# Altium PCB ZBoard_2022-08-04.pcbdoc (part 1 of 2)
Units mil, origin at the board's own origin, x right, y up, seen from the top; angles counter-clockwise.
Board outline 6819.96 x 4772.13 mil, 2 copper layers (Top Layer, Bottom Layer); 74 components, 107 nets, 320 pads, 194 vias.
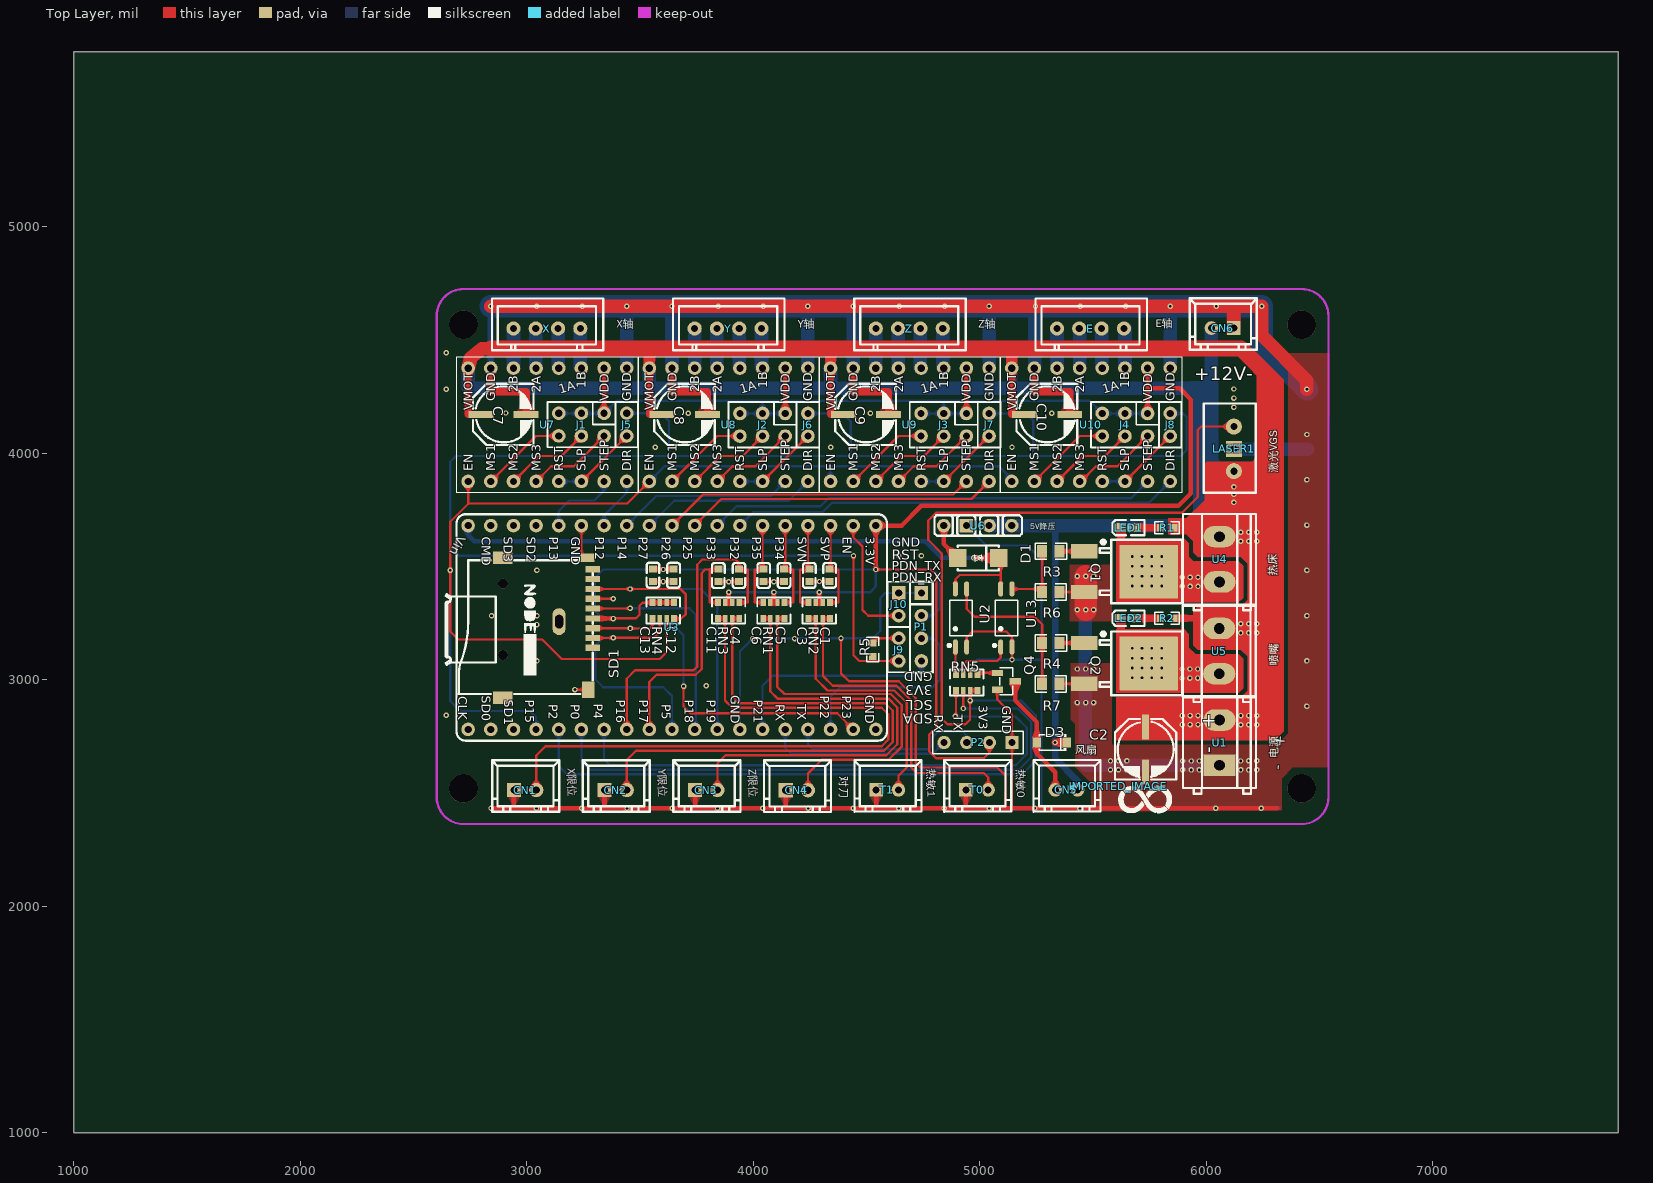
[diagram p0: Top Layer view]
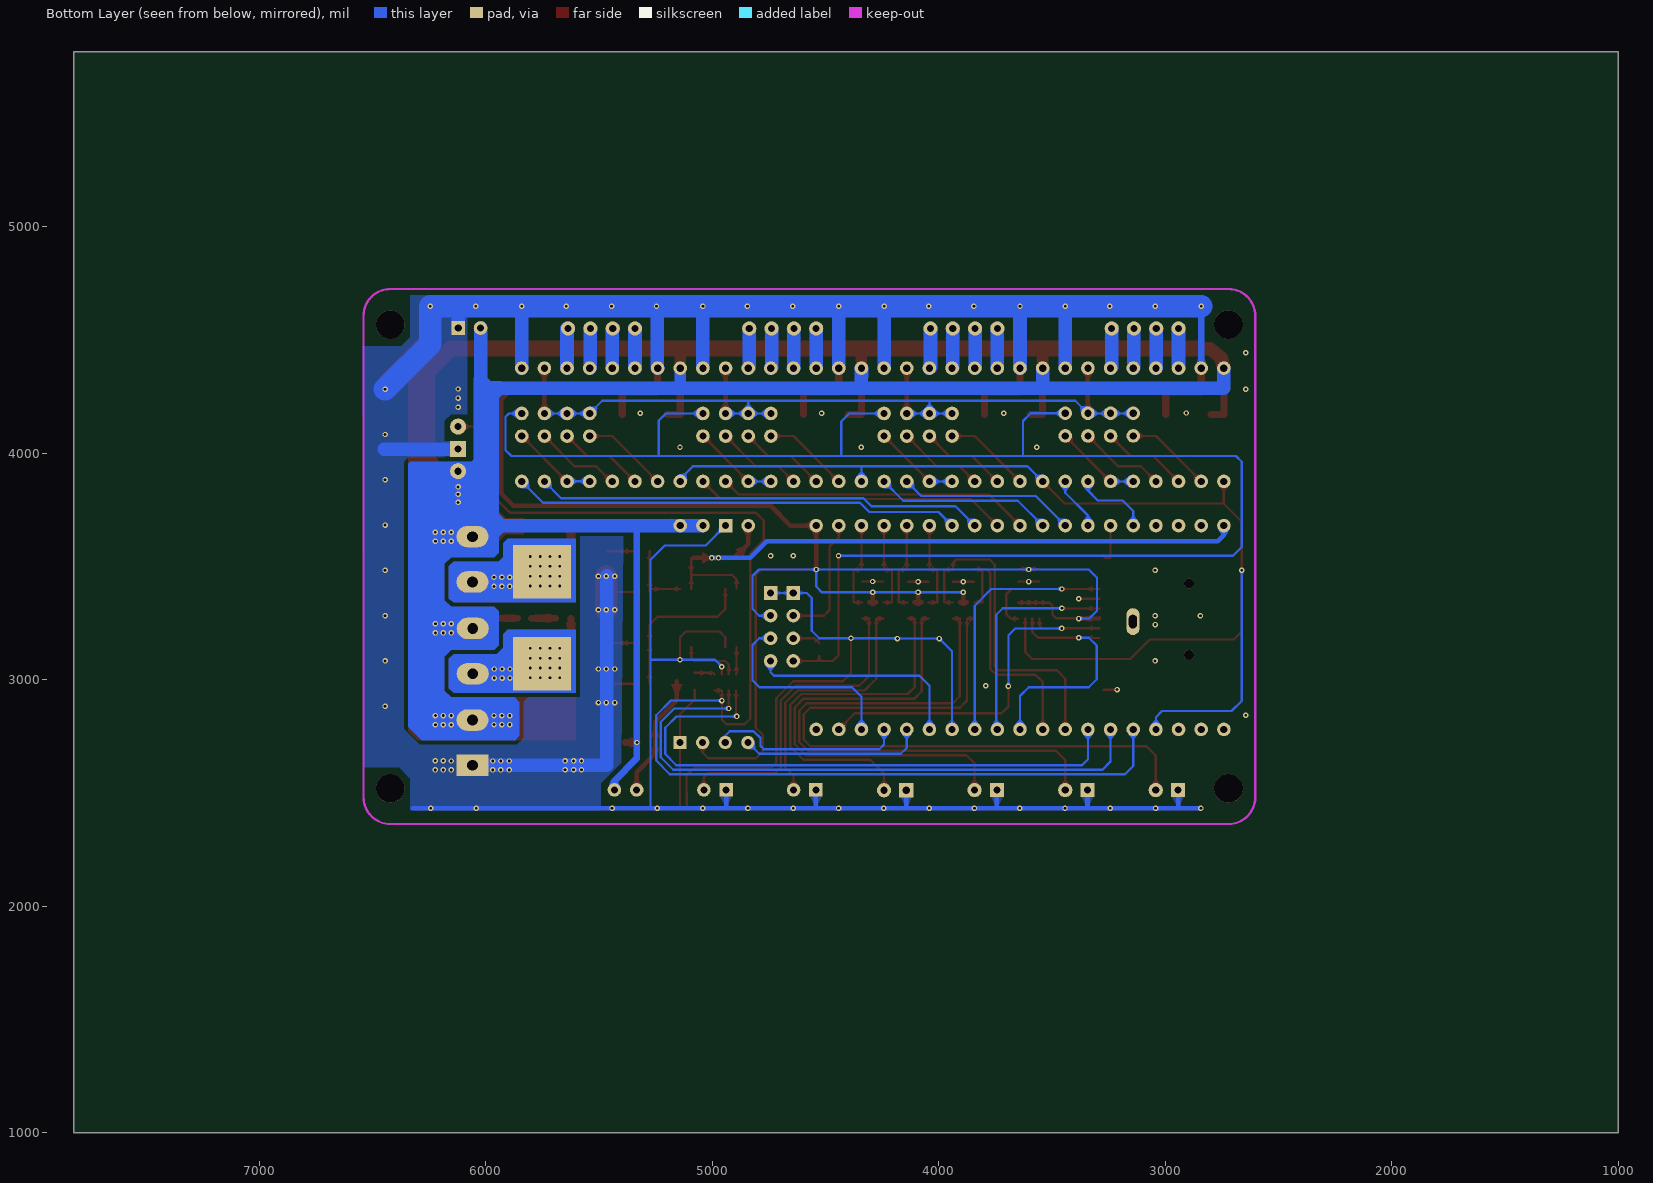
[diagram p1: Bottom Layer view, seen from below]

## Layer stack, top to bottom
Top Layer: signal copper (thickness not stored)
Dielectric: dielectric 12.6, FR-4, Dk 4.8
Bottom Layer: signal copper (thickness not stored)

## Board outline
7819.96,1000 1000,1000 1000,5772.13 7819.96,5772.13

## Components (designator, comment, footprint, x,y, rotation, side; value= is the part's Value field where it differs from the comment)
C1 "100nF" C0603 4338,3460.13 r90 top
C2 "100uF" CAP-D6.3XH7.7 5732.96,2690.74 r90 top
C3 "100nF" C0603 4248,3460.13 r90 top
C4 "100nF" C0603 3937.4,3459.83 r90 top
C5 "100nF" C0603 4136.7,3459.83 r90 top
C6 "100nF" C0603 4046.7,3459.83 r90 top
C7 "100uF" CAP-D6.3XH7.7 2897.96,4170.74 r180 top
C8 "100uF" CAP-D6.3XH7.7 3697.96,4170.74 r180 top
C9 "100uF" CAP-D6.3XH7.7 4497.96,4170.74 r180 top
C10 "100uF" CAP-D6.3XH7.7 5297.96,4170.74 r180 top
C11 "100nF" C0603 3846.3,3459.83 r90 top
C12 "100nF" C0603 3648.6,3459.83 r270 top
C13 "100nF" C0603 3557.5,3460.43 r270 top
CN1 "X限位" CONN-TH_XH-2A#1 2992.96,2512 r0 top
CN2 "Y限位" CONN-TH_XH-2A#1 3392.96,2512 r0 top
CN3 "Z限位" CONN-TH_XH-2A#1 3792.96,2512 r0 top
CN4 "对刀" CONN-TH_XH-2A#1 4192.96,2511.3 r0 top
CN5 "FAN" CONN-TH_XH-2A#2 5383.45,2512.93 r0 top
CN6 "FAN0" CONN-TH_XH-2A#3 6072.96,4552 r0 top
D1 "SS24_C84028" DO-214AC_L4.3-W2.7-LS5.3-RD 4993.95,3537 r180 top
D3 "SS14D1F" SOD-123_L2.8-W1.8-LS3.7-RD 5317.96,2722 r180 top
E "E轴" CONN-TH_4P-P2.50_XH-4A 5489.35,4549.83 r0 top
IMPORTED_IMAGE "IMPORTED_IMAGE" IMPORTED_IMAGE 5612.72,2528.33 r0 top
J1 "Header-Male-2.54_2x3" HDR-TH_6P-P2.54-V-R2-C3-S2.54 3241.7,4125.73 r180 top
J2 "Header-Male-2.54_2x3" HDR-TH_6P-P2.54-V-R2-C3-S2.54 4041.7,4124.83 r180 top
J3 "Header-Male-2.54_2x3" HDR-TH_6P-P2.54-V-R2-C3-S2.54 4841.7,4124.83 r180 top
J4 "Header-Male-2.54_2x3" HDR-TH_6P-P2.54-V-R2-C3-S2.54 5641.7,4124.83 r180 top
J5 "X_UART" HDR-2X1/2.54#1 3441.7,4125.74 r180 top
J6 "Y_UART" HDR-2X1/2.54#1 4241.7,4124.83 r180 top
J7 "Z_UART" HDR-2X1/2.54#1 5041.7,4124.83 r180 top
J8 "E_UART" HDR-2X1/2.54#1 5841.7,4124.83 r180 top
J9 "PDN_UART" HDR-2X1/2.54#1 4643,3132 r0 top
J10 "RESET" HDR-2X1/2.54#2 4642.96,3332 r0 top
LASER1 "激光VGS" CONN-TH_XH-3A 6122.96,4018.38 r90 top
LED1 "LED-Blue(0603)" LED-0603-R 5657.96,3670.74 r0 top
LED2 "LED-Blue(0603)" LED-0603-R 5657.96,3270.74 r0 top
P1 "I2C" 排母2.54_1X4 4742.96,3232 r270 top
P2 "UART" HDR1X4 5192.96,2672 r90 top
Q1 "YJD20N06A" TO-252-2_L6.6-W6.1-P4.57-LS9.9-BR-CW 5604.21,3476.95 r180 top
Q2 "YJD20N06A" TO-252-2_L6.6-W6.1-P4.57-LS9.9-BR-CW 5604.21,3071.04 r180 top
Q4 "AS2304" SOT-23-3_L2.9-W1.3-P1.90-LS2.4-BR 5117.96,2992 r180 top
R1 "2.7K" R0603 5827.9,3670.73 r0 top
R2 "2.7K" R0603 5827.9,3270.73 r0 top
R3 "1K" R0805 5314.3,3566.63 r180 top
R4 "1K" R0805 5314.3,3161.63 r180 top
R5 "1K" R0603 4527.96,3132 r270 top
R6 "100K" R0805 5314.2,3386.03 r180 top
R7 "100K" R0805 5314.2,2981.03 r180 top
RN1 "4.7K" RES-ARRAY-SMD_0603-8P-L3.2-W1.6-BL 4091.7,3304.84 r180 top
RN2 "4.7K" RES-ARRAY-SMD_0603-8P-L3.2-W1.6-BL 4291.7,3304.84 r180 top
RN3 "4.7K" RES-ARRAY-SMD_0603-8P-L3.2-W1.6-BL 3891.7,3304.84 r180 top
RN4 "4.7K" RES-ARRAY-SMD_0603-8P-L3.2-W1.6-BL 3603,3304.04 r0 top
RN5 "470" RES-ARRAY-SMD_0603-8P-L3.2-W1.6-BL 4943,2987.04 r180 top
SD1 "TF-Card" TF卡带孔 3051.7,3189.83 r180 top
T0 "热敏0" CONN-TH_XH-2A#4 4988.46,2512.9 r0 top
T1 "热敏1" CONN-TH_XH-2A#4 4592.26,2512.9 r0 top
U1 "电源" CONN-TH_P5.08_KF127-5.08-2P#1 6059.22,2721.02 r90 top
U2 "EL3H7(B)(TA)-G" SOP-4_L4.4-W2.8-P1.27-LS7.0-TL 4917.96,3272 r90 top
U3 "NodeMCU-32SLua" AI-THINKER_NODEMCU-32SLUA 3641.7,3229.83 r270 top
U4 "热床" CONN-TH_P5.08_KF127-5.08-2P#2 6059.22,3531.02 r90 top
U5 "喷嘴" CONN-TH_P5.08_KF127-5.08-2P#2 6057.96,3125.74 r90 top
U6 "5V降压" DC_MOUDLE 5141.7,3679.83 r270 top
U7 "4988" ?#1 3091.7,4124.83 r90 top
U8 "4988" ?#1 3891.7,4124.83 r90 top
U9 "4988" ?#1 4691.7,4124.83 r90 top
U10 "4988" ?#1 5491.7,4124.83 r90 top
U13 "EL3H7(B)(TA)-G" SOP-4_L4.4-W2.8-P1.27-LS7.0-TL 5117.96,3272 r90 top
X "X轴" CONN-TH_4P-P2.50_XH-4A 3089.35,4549.83 r0 top
Y "Y轴" CONN-TH_4P-P2.50_XH-4A 3889.35,4549.83 r0 top
Z "Z轴" CONN-TH_4P-P2.50_XH-4A 4689.35,4549.83 r0 top
? "" ?#2 2132.48,3544.64 r0 top
? "" ?#2 6867.96,3548.38 r0 top
? "" ?#2 4576.46,4945.44 r0 top
? "" ?#2 4573.35,2019.2 r0 top

## Footprints (in the part's own frame and the unit in brackets; to place one, negate y for a bottom-side part, rotate by r counter-clockwise, add the part's x,y. Pads: shape width x height; smd on the part's side, far side on the other; paste and mask are expansions set on the pad)
AI-THINKER_NODEMCU-32SLUA [mil]
  round 60 hole 32: 1(-450,-900) 2(-450,-800) 3(-450,-700) 4(-450,-600) 5(-450,-500) 6(-450,-400) 7(-450,-300) 8(-450,-200) 9(-450,-100) 10(-450,0) 11(-450,100) 12(-450,200) 13(-450,300) 14(-450,400) 15(-450,500) 16(-450,600) 17(-450,700) 18(-450,800) 19(-450,900) 20(450,-900) 21(450,-800) 22(450,-700) 23(450,-600) 24(450,-500) 25(450,-400) 26(450,-300) 27(450,-200) 28(450,-100) 29(450,0) 30(450,100) 31(450,200) 32(450,300) 33(450,400) 34(450,500) 35(450,600) 36(450,700) 37(450,800) 38(450,900)
  silkscreen extent -500,-999 500,949
C0603 [mm]
  rect 0.8x0.9 smd: 1(-0.7,0) 2(0.7,0)
  silkscreen extent -1.41,-0.71 1.39,0.72
CAP-D6.3XH7.7 [mm]
  rect 2.8x0.8 smd: 1(2.54,0) 2(-2.54,0)
  silkscreen extent -3.37,-3.43 3.43,3.43
CONN-TH_4P-P2.50_XH-4A [mm]
  round 1.6 hole 0.8: 1(-3.75,0) 2(-1.25,0) 3(1.25,0) 4(3.75,0)
  silkscreen extent -6.17,-2.44 6.33,3.38
CONN-TH_P5.08_KF127-5.08-2P#1 [mm]
  rect 2.4x3.6 hole 1.2: 1(-2.54,0)
  oval 2.4x3.6 hole 1.2: 2(2.54,0)
  silkscreen extent -5.71,-4.1 5.08,4.1
CONN-TH_P5.08_KF127-5.08-2P#2 [mm]
  oval 2.4x3.6 hole 1.2: 1(-2.54,0) 2(2.54,0)
  silkscreen extent -5.71,-4.1 5.08,4.1
CONN-TH_XH-2A#1 [mm]
  rect 1.6x1.6 hole 0.8: 1(-1.251,0)
  round 1.6 hole 0.8: 2(1.251,0)
  silkscreen extent -3.69,-2.45 3.83,3.35
CONN-TH_XH-2A#2 [mm]
  round 1.524 hole 0.8: 1(-1.251,0) 2(1.251,0)
  silkscreen extent -3.69,-2.45 3.83,3.35
CONN-TH_XH-2A#3 [mm]
  round 1.524 hole 0.8: 1(-1.251,0)
  rect 1.524x1.524 hole 0.8: 2(1.251,0)
  silkscreen extent -3.69,-2.45 3.83,3.35
CONN-TH_XH-2A#4 [mm]
  rect 1.524x1.524 hole 0.8: 1(-1.251,0)
  round 1.524 hole 0.8: 2(1.251,0)
  silkscreen extent -3.69,-2.45 3.83,3.35
CONN-TH_XH-3A [mm]
  round 1.8 hole 0.8: 1(-2.501,0) 3(2.501,0)
  rect 1.8x1.8 hole 0.8: 2(0.001,0)
  silkscreen extent -4.92,-2.44 5.09,3.38
DC_MOUDLE [mil]
  round 60 hole 31.5: 1(0,0) 2(0,-100) 4(0,-300)
  rect 60x60 hole 31.5: 3(0,-200)
  silkscreen extent -46,-340 46,45
DO-214AC_L4.3-W2.7-LS5.3-RD [mm]
  rect 2x2 smd: 1(-2.3,0) 2(2.3,0)
  silkscreen extent -2.3,-1.4 2.3,1.4
HDR1X4 [mm]
  rect 1.5x1.5 hole 0.8: 1(1.271,1.269)
  round 1.5 hole 0.8: 2(1.271,3.808) 3(1.271,6.348) 4(1.271,8.888)
  silkscreen extent 0,0 2.54,10.16
HDR-2X1/2.54#1 [mil]
  round 60 hole 31.5: 1(0,50) 2(0,-50)
  silkscreen extent -50,-100 50,100
HDR-2X1/2.54#2 [mil]
  rect 60x60 hole 31.5: 1(0,50)
  round 60 hole 31.5: 2(0,-50)
  silkscreen extent -50,-100 50,100
HDR-TH_6P-P2.54-V-R2-C3-S2.54 [mil]
  round 60 hole 31.5: 1(-100,-50) 2(-100,50) 3(0,-50) 4(0,50) 5(100,-50) 6(100,50)
  silkscreen extent -150,-100 150,100
IMPORTED_IMAGE [mil]
  silkscreen extent 0,-118 236,0
LED-0603-R [mil]
  rect 43x39 smd: 1(33.5,0) 2(-33.5,0)
  silkscreen extent -72,-34 70,34
R0603 [mil]
  rect 31.75x34.02 smd: 1(-29.65,0) 2(29.65,0)
  silkscreen extent -55,-26 55,26
R0805 [mil]
  rect 44.59x54.21 smd: 1(-38.04,0) 2(38.04,0)
  silkscreen extent -69,-36 69,36
RES-ARRAY-SMD_0603-8P-L3.2-W1.6-BL [mm]
  rect 0.65x0.8 smd: 1(-1.2,-0.9) 4(1.2,-0.9) 5(1.2,0.9) 8(-1.2,0.9)
  rect 0.5x0.8 smd: 2(-0.4,-0.9) 3(0.4,-0.9) 6(0.4,0.9) 7(-0.4,0.9)
  silkscreen extent -1.87,-1.45 1.87,1.47
SOD-123_L2.8-W1.8-LS3.7-RD [mm]
  rect 0.95x1.15 smd: 1(-1.693,0) 2(1.693,0)
  silkscreen extent -1.63,-0.94 1.41,0.94
SOP-4_L4.4-W2.8-P1.27-LS7.0-TL [mm]
  oval 1.71x0.56 smd: 1(-3.255,0.635) 2(-3.255,-0.635) 3(3.255,-0.635) 4(3.255,0.635)
  silkscreen extent -3.24,-1.25 1.97,1.47
SOT-23-3_L2.9-W1.3-P1.90-LS2.4-BR [mm]
  rect 1.25x0.7 smd: 1(1,-0.95) 2(1,0.95) 3(-1,0)
  silkscreen extent -0.73,-1.53 0.73,1.53
TF卡带孔 [mil]
  rect 63x27.6 smd: 1(-240,50) 2(-240,6) 3(-240,-37) 4(-240,-80) 5(-240,-124) 6(-240,-167) 7(-240,-210) 8(-240,-254) 9(-240,-297)
  rect 63x39.37 smd: 10(-216,-348.05)
  rect 86.6x55.1 smd: 11(158,-348.05) 12(158,269.95)
  rect 55.1x70.9 smd: 13(-219.95,234.95)
  round 43.31 hole 43.31 unplated: ""(155.85,81.08) ""(155.85,-233.88)
  silkscreen extent -240,-337 351,254
TO-252-2_L6.6-W6.1-P4.57-LS9.9-BR-CW [mm]
  rect 3x1.6 smd: 1(3.617,-2.285) 3(3.611,2.285)
  rect 6.5x6 smd: 2(-3.617,0)
  silkscreen extent -7.37,-3.57 1.88,3.57
排母2.54_1X4 [mil]
  rect 60x60 hole 31.5: 1(-150,0)
  round 60 hole 31.5: 2(-50,0) 3(50,0) 4(150,0)
  silkscreen extent -200,-50 200,50
?#1 [mil]
  round 60 hole 32: 1(-250,350) 2(-250,250) 3(-250,150) 4(-250,50) 5(-250,-50) 6(-250,-150) 7(-250,-250) 8(-250,-350) 9(250,-350) 10(250,-250) 11(250,-150) 12(250,-50) 13(250,50) 14(250,150) 15(250,250) 16(250,350)
  silkscreen extent -300,-400 300,400
?#2 [mil]

## Free pads (board coordinates)
  rect 255.91x236.22 smd: 2(5747.96,3070.74) 2(5747.96,3475.74)
  rect 255.91x236.22 smd far side: 2(5752.96,3070.74) 2(5752.96,3475.74)
  oval 59.05x118.11 hole 35.4 slot 59.05 at 90 deg: 3(3142.96,3255.74)
  round 125.98 hole 125.98 unplated: ""(2721.07,2519.48) ""(2721.07,4566.72) ""(6421.86,2519.48) ""(6421.86,4566.72)

## Via types
v1: diameter 24, hole 12, Top Layer to Bottom Layer, tented both sides, 152 vias
v2: diameter 24.02, hole 12.01, Top Layer to Bottom Layer, tented both sides, 42 vias

## Nets (pads, with @x,y where several pads share a name; then routed paths per layer and width w, separated by ;. In a path a pad name is that pad's centre, name@x,y a point inside that pad or via, vN(x,y) a via of type N, cw(c..) or ccw(c..) an arc to the next point about the centre after c; other vN are vias at no path point)
3V3: C12.1 C13.1 J1.1 J1.3 J1.5 J2.1 J2.3 J2.5 J3.1 J3.3 J3.5 J4.1 J4.3 J4.5 P1.2 P2.2 RN1.2 RN1.3 RN2.2 RN2.3 RN3.2 RN3.3 RN4.5 RN4.6 RN4.7 RN4.8 SD1.4 U3.19 U7.10 U8.10 U9.10 U10.10 | length 11346.5
  Top Layer w10: v1@3381.7,3269.33 3383.1,3270.73 3483,3270.73 3498,3285.73 3498,3325.73 3511.7,3339.43 RN4.5@3650.2,3339.43 ; C13.1@3557.5,3487.99 C12.1@3648.6,3487.39 ; v1(4541.7,3485.74) 4784.6,3485.73 4808,3462.33 4808,2787.03 4778,2757.03 4778,2682.03 4807.9,2652.03 5018,2652.03 5043,2676.93 P2.2@5043.03,2722.02
  Top Layer w20: SD1.4@3291.7,3269.83 v1@3381.7,3269.33 ; J1.1@3341.7,4174.83 U7.10@3341.7,4374.83 ; RN3.3@3875.9,3340.23 RN3.2@3907.4,3340.23 ; 3891.7,3340.23 v1(3891.7,3384.83) ; RN1.3@4075.9,3340.23 RN1.2@4107.5,3340.23 ; v1(4091.7,3384.83) 4091.7,3340.53 4091.96,3340.26 ; J2.1@4141.7,4174.83 U8.10@4141.7,4374.83 ; RN2.3@4275.9,3340.23 RN2.2@4307.5,3340.23 ; v1(4291.7,3384.83) 4291.7,3340.61 4292.05,3340.26 ; v1(4541.7,3485.74) U3.19@4541.7,3679.83 4655.8,3679.83 4743,3767.03 5878,3767.03 5933,3822.03 5933,4180.73 5933,4235.73 5883,4285.73 5741.7,4285.73 J4.1@5741.7,4174.83 U10.10@5741.7,4375.13 ; J3.1@4941.7,4174.83 U9.10@4941.7,4374.83
  Bottom Layer w10: J1.5@3141.7,4174.83 3241.7,4174.83 J1.1@3341.7,4174.83 ; J1.1@3341.7,4170.73 3341.7,4174.53 3397.9,4230.73 4041.7,4230.73 ; v1@3381.7,3269.33 3336.2,3269.33 3301.7,3303.83 3301.7,3449.83 3336.7,3484.83 3544.91,3485.74 ; 3547.96,3485.74 3544.91,3485.74 ; v1(3891.7,3384.83) v1(4091.7,3384.83) 4515.8,3384.83 4541.7,3410.73 v1(4541.7,3485.74) ; J2.5@3941.7,4174.83 J2.3@4041.7,4174.83 ; J2.1@4141.7,4174.83 J2.3@4041.7,4174.83 ; J3.5@4741.7,4174.83 J3.3@4841.7,4174.83 ; P1.2@4748,3282.03 4793,3282.03 4823,3312.03 4823,3457.03 4794.2,3485.73 v1(4541.7,3485.74) ; J3.1@4941.7,4174.83 J3.3@4841.7,4174.83 ; J4.5@5541.7,4174.83 5485.8,4230.73 4841.7,4230.73 ; J4.5@5546.7,4174.83 5646.7,4174.83 J4.1@5746.7,4174.83 ; 3544.91,3485.74 v1(4541.7,3485.74) ; J2.3@4041.7,4174.83 4041.7,4230.73 ; J2.3@4041.7,4174.83 4041.7,4230.73 ; 4041.7,4230.73 4841.7,4230.73 ; J3.3@4841.7,4174.83 4841.7,4230.73 ; J3.3@4841.7,4174.83 4841.7,4230.73
  other v1: 3381.7,3269.36 3602.96,3485.74
+5V: D1.1 U2.4 U3.1 U13.4 | length 2931.7
  Top Layer w10: U2.4@4893,3400.13 4893,3442.93 4912,3462.03 5093,3462.03 5093,3537.03 D1.1@5084.5,3537 5093,3528.53 U13.4@5093,3400.13
  Top Layer w20: v1(4973,3537.03) D1.1@5084.5,3537
  Bottom Layer w20: U3.1@2741.7,3679.83 2741.7,3637.03 2768,3610.73 4759.2,3610.73 4832.9,3537.03 v1(4973,3537.03) v1(5002.96,3537)
+12V: C2.1 C7.1 C8.1 C9.1 C10.1 CN5.2 CN6.1 D3.1 LASER1.1 R1.2 R2.2 U1.2 U4.2 U5.2 U6.1 U6.2 U7.16 U8.16 U9.16 U10.16 | length 14402.1
  Top Layer w30: v1(5332.96,2722) D3.1@5384.59,2722 ; R1.2@5857.55,3670.73 6019.5,3670.73 U4.2@6059.22,3631.02 ; R2.2@5858.9,3271.03 6014.3,3271.03 U5.2@6059.3,3226.03
  Top Layer w31.5: U7.16@2741.7,4374.83 2741.7,4170.73 C7.1@2797.96,4170.74 ; U8.16@3541.7,4374.83 3541.7,4170.73 C8.1@3597.96,4170.74 ; U9.16@4341.7,4374.83 4341.7,4170.73 C9.1@4397.96,4170.74 ; U10.16@5141.7,4375.13 5141.7,4170.73 C10.1@5197.96,4170.74
  Top Layer w50: U8.16@3541.7,4374.83 3542.96,4470.74 ; U9.16@4341.7,4374.83 4342.96,4465.74 ; U10.16@5141.7,4374.83 5141.7,4460.73
  Top Layer w60: U7.16@2741.7,4374.83 2752.96,4420.74 2802.96,4460.74 2843,4460.73 ; U4.2@6059.22,3631.02 6123,3694.73 6123,3876.13 ; LASER1.1@6122.96,3912 6132.95,3922 6272.96,3922
  Top Layer w70.87: 2843,4460.73 6154.2,4460.73 6308,4306.93 6308,3631.03 U4.2@6059.22,3631.02
  Bottom Layer w30: 5334.2,3679.83 5334.2,2650.83 5432.7,2552.23 CN5.2@5432.7,2512.93
  Bottom Layer w50: 5141.7,4285.94 U10.16@5141.7,4375.11
  Bottom Layer w59.92: U6.2@5041.7,3679.83 5935.1,3679.83 5983.9,3631.03 U4.2@6059.22,3631.02
  Bottom Layer w60: U7.16@2741.7,4374.83 2742.96,4285.74 ; 2754.2,4286.63 5990,4286.63 5990,3700.23 U4.2@6059.22,3631.02 6123,3694.73 LASER1.1@6122.96,3919.93 6023,3919.93 CN6.1@6023,4552.03 ; 3541.7,4285.83 U8.16@3541.7,4374.83 ; U9.16@4341.7,4374.83 4342.96,4286.65
  other v1: 5894.22,2801.02 5929.22,2801.02 5964.22,2801.02 6152.96,2800.74 6187.96,2800.74 6222.96,2800.74 5894.22,2841.02 5929.22,2841.02 5964.22,2841.02 6152.96,2840.74 6187.96,2840.74 6222.96,2840.74 6152.96,3205.74 6187.96,3205.74 6222.96,3205.74 6152.96,3245.74 6187.96,3245.74 6222.96,3245.74 6152.96,3610.74 6187.96,3610.74 6222.96,3610.74 6152.96,3650.74 6188.58,3650.74 6223.58,3650.74 6122.96,3782 6122.92,3817.84 6122.96,3850.56
CN3_2: CN3.2 RN1.5 RN1.6 | length 2053.1
  Top Layer w10: CN3.2@3842.21,2512 3842.2,2629.93 3878,2665.73 4588,2665.73 4636.7,2714.43 4636.7,2877.03 4598,2915.73 4108,2915.73 4075.9,2947.83 RN1.6@4075.95,3269.41 RN1.5@4044.46,3269.41
CN4_2: CN4.2 RN1.7 RN1.8 | length 1636.4
  Top Layer w10: RN1.8@4136.7,3269.83 4106.7,3269.83 4106.7,2967.03 4138,2935.73 4608,2935.73 4656.7,2887.03 4656.7,2704.43 4598,2645.73 4302.6,2645.73 4242.2,2585.33 CN4.2@4242.21,2511.3
E_DIR: U3.13 U10.8 | length 1981.6
  Bottom Layer w10: U3.13@3941.7,3679.83 4001.7,3739.83 4307.1,3739.83 4348,3780.73 5748,3780.73 U10.8@5842.4,3875.13
E_STEP: U3.12 U10.7 | length 1981.6
  Bottom Layer w10: U3.12@3841.7,3679.83 3926.7,3764.83 4297.1,3764.83 4333,3800.73 5668,3800.73 U10.7@5742.4,3875.13
E_UART: J8.1 U10.5 U10.6 | length 382.8
  Top Layer w10: U10.6@5641.7,3874.83 J8.1@5841.7,4074.83
  Bottom Layer w10: U10.5@5541.7,3875.11 U10.6@5641.7,3875.11
EN: J10.2 U3.18 | length 560.3
  Top Layer w10: U3.18@4441.7,3679.83 4441.7,3628.23 4483,3587.03 4483,3307.03 4507.9,3282.03 J10.2@4642.96,3282
GND: C1.1 C2.2 C3.1 C4.1 C5.1 C6.1 C7.2 C8.2 C9.2 C10.2 C11.1 C12.2 C13.2 CN1.1 CN2.1 CN3.1 CN4.1 CN6.2 J10.1 LASER1.2 P1.1 P2.1 pad.3 Q1.3 Q2.3 Q4.2 R6.1 R7.1 RN5.2 SD1.6 SD1.10 SD1.11 SD1.12 SD1.13 T0.1 T1.1 U1.1 U2.2 U3.6 U3.32 U3.38 U6.3 U7.9 U7.15 U8.9 U8.15 U9.9 U9.15 U10.9 U10.15 U13.2 | length 27856.2
  Top Layer w10: v1(3212.96,2955.74) 3213,2954.83 SD1.13@3271.7,2954.83 ; U3.6@3241.7,3679.83 3241.7,3537.83 SD1.10@3267.7,3537.83 ; SD1.6@3291.7,3356.83 v1(3381.7,3356.83) ; C13.2@3557.5,3432.83 v1(3603.56,3432.53) C12.2@3648.6,3432.23 ; C11.1@3846.2,3432.23 3892.3,3432.23 C4.1@3937.4,3432.23 ; C6.1@4046.7,3432.23 C5.1@4136.7,3432.23 ; C3.1@4248,3432.53 C1.1@4336.7,3432.83 ; v1(4387.96,3182) 4388,3026.93 4423,2992.03 4643,2992.03 4718,2917.03 4718,2632.03 4738,2611.93 5078,2611.93 5114.1,2575.83 5113,2431.83 5076.7,2431.83 ; U2.2@4943,3143.83 4943,3187.03 4968,3212.03 5118,3212.03 5143,3187.03 5143,3143.83 v1(5142.96,3087) ; v1(4958,3057.03) RN5.2@4958.7,3022.43 ; Q4.2@5078.59,2954.6 5078,2954.03 5078,2912.03 5143,2846.93 P2.1@5143.01,2722.05 5143,2432.03 ; R7.1@5343.9,2981.03 Q2.3@5462.1,2981.03 ; R6.1@5343.9,3386.03 Q1.3@5462.06,3386.99
  Top Layer w20: v2(2842.96,2432) 6312.96,2432 ; 2943.7,2432.03 CN1.1@2943.71,2512 ; 3343.7,2432.03 CN2.1@3343.71,2512 ; 3743.7,2432.03 CN3.1@3743.71,2512 ; 4143.7,2432.03 CN4.1@4143.71,2511.3 ; 4543,2432.03 T1.1@4543.01,2512.9 ; 4939.2,2432.03 T0.1@4939.21,2512.9
  Top Layer w31.5: U7.15@2841.7,4374.83 2841.7,4270.73 2998,4270.73 C7.2@2997.96,4170.74 ; U8.15@3641.7,4374.83 3641.7,4270.73 3798,4270.73 C8.2@3797.96,4170.74 ; U9.15@4441.7,4374.83 4441.7,4270.73 4598,4270.73 C9.2@4597.96,4170.74 ; U10.15@5241.7,4375.13 5241.7,4270.73 5398,4270.73 C10.2@5397.96,4170.74
  Top Layer w60: v1@2841.7,4648.73 v2(6245.17,4648.78) 6245.2,4519.73 6445.2,4319.73 v2(6445.17,4281.99) ; 6122,4648.83 CN6.2@6122.21,4552
  Top Layer w100: v1(5467.96,3307.59) v1(5467.96,3455.74)
  Bottom Layer w10: U3.32@3941.7,2779.83 3941.7,3124.53 v1(3997.96,3180.74) ; v1(3997.96,3180.74) v1(4182.96,3180.74) 4184.21,3182 v1(4387.96,3182) ; v1(4387.96,3182) 4528,3182.03 4560.9,3214.93 4560.9,3359.93 4583,3382.03 P1.1@4742.96,3382 ; U6.3@4941.7,3679.83 5029.5,3592.03 5209.8,3592.03 5273,3528.83 5273,2432.03 v2(5242.96,2432) ; v1(4958,3057.03) 4987.97,3087 v1(5142.96,3087) ; v1(5142.96,3087) 5273,3086.83
  Bottom Layer w20: v2(2842.96,2432) 6322.96,2432 ; 2943.7,2432.03 CN1.1@2943.71,2512 ; 3343.7,2432.03 CN2.1@3343.71,2512 ; 3743.7,2432.03 CN3.1@3743.71,2512 ; 4143.7,2432.03 CN4.1@4143.71,2511.3 ; 4543,2432.03 T1.1@4543.01,2512.9 ; 4939.2,2432.03 T0.1@4939.21,2512.9
  Bottom Layer w30: U7.15@2841.7,4374.83 v1@2841.7,4654.83
  Bottom Layer w60: U7.9@3441.7,4374.83 v1@3441.7,4654.83 ; U8.15@3641.7,4374.83 v1@3641.7,4654.83 ; U8.9@4241.7,4374.83 v1@4241.7,4654.83 ; U9.15@4441.7,4374.83 v1@4441.7,4654.83 ; U9.9@5041.7,4374.83 v1@5041.7,4654.83 ; U10.15@5241.7,4375.13 5243.1,4376.53 v1@5243.1,4654.83 ; v1@5467,3459.13 5467,2621.03 U1.1@6059.3,2621.03 ; U10.9@5841.7,4375.13 v1@5841.7,4648.73 ; 6122,4648.83 CN6.2@6122.21,4552 ; LASER1.2@6122.96,4018.43 6124.4,4017.03 6448,4017.03
  Bottom Layer w100: v1@2841.7,4648.73 v2(6245.17,4648.78) 6245.2,4481.93 v2(6445.17,4281.99)
  other v1: 5577.96,2601.33 5612.96,2601.33 5650.25,2601.33 5896.93,2601.02 5934.22,2601.02 5969.22,2601.02 6153.06,2600.85 6188.06,2600.85 6223.06,2600.85 5896.93,2640.43 5934.22,2640.43 5969.22,2640.43 6153.06,2640.43 5577.96,2640.74 5612.96,2640.74 5650.25,2640.74 6188.06,2640.85 6223.06,2640.85 5430.67,2898.33 5467.96,2898.33 5502.96,2898.33 3792.96,2972 5430.67,3046.48 5467.96,3046.48 5502.96,3046.48 5430.67,3307.59 5502.96,3307.59 3892.3,3432.27 4091.7,3432.27 4292.7,3432.83 5430.67,3455.74 5502.96,3455.74 4642.96,3547 4742.96,3547 3567.96,4025.74 4342.96,4025.74 5142.96,4025.74 3712.96,4175.74 4517.96,4175.74 5317.96,4175.74 2907.96,4177 6122.92,4202.84 6122.92,4242.84 6122.92,4282.84 2841.7,4648.77 3441.7,4648.77 3641.7,4648.77 4241.7,4648.77 4441.7,4648.77 5041.7,4648.77 5246.7,4648.77 5841.7,4648.77
  other v2: 3042.96,2432 3242.96,2432 3442.96,2432 3642.96,2432 3842.96,2432 4042.96,2432 4242.96,2432 4442.96,2432 4642.96,2432 4842.96,2432 5042.96,2432 5442.96,2432 6042.96,2432 6242.96,2432 2645.07,2842.72 6445.17,2881.99 3045.17,3081.99 6445.17,3081.99 3045.07,3242.72 2845.17,3281.99 3045.17,3281.99 6445.17,3281.99 3045.17,3481.99 6445.17,3481.99 6445.17,3681.99 6445.17,3881.99 6445.17,4081.99 2645.17,4281.99 2645.07,4442.72 3045.07,4648.77 3245.07,4648.77 3845.07,4648.77 4045.07,4648.77 4645.07,4648.77 4845.07,4648.77 5445.07,4648.77 5645.07,4648.77 6045.17,4648.78
HEATER: RN5.5 U3.26 | length 2596.5
  Top Layer w10: v1(4892.96,2837) 4895.7,2839.73 RN5.5@4895.7,2951.53
  Bottom Layer w10: U3.26@3341.7,2779.83 3341.7,2648.23 3367.9,2622.03 5159.2,2622.03 5208,2670.83 5208,2787.03 5158,2837.03 v1(4892.96,2837)
HEATER_SENSOR: C1.2 RN2.1 U3.17 | length 412.8
  Top Layer w10: RN2.1@4338.9,3339.83 4376.7,3339.83 4376.7,3484.83 4341.7,3484.83 U3.17@4341.7,3679.83
HOTBED: RN5.6 U3.25 | length 2725.4
  Top Layer w10: RN5.6@4927.2,2951.53 4927.2,2872.73 v1(4927.96,2872)
  Bottom Layer w10: U3.25@3241.7,2779.83 3241.7,2638.23 3277.9,2602.03 5173,2602.03 5228,2657.03 5228,2812.03 5168,2872.03 v1(4927.96,2872)
HOTBED_SENSOR: C3.2 RN2.4 U3.16 | length 412.8
  Top Layer w10: U3.16@4241.7,3679.83 4241.7,3484.83 4206.7,3484.83 4206.7,3339.83 RN2.4@4244.5,3339.83
J1_2: J1.2 U7.4 | length 382.8
  Top Layer w10: U7.4@3041.7,3874.83 3108.9,3942.03 3208.9,3942.03 J1.2@3341.7,4074.83
J1_4: J1.4 U7.3 | length 382.8
  Top Layer w10: U7.3@2941.7,3874.83 3053.9,3987.03 3153.9,3987.03 J1.4@3241.7,4074.83
J1_6: J1.6 U7.2 | length 382.8
  Top Layer w10: U7.2@2841.7,3874.83 3041.7,4074.83 J1.6@3141.7,4074.83
J9_1: J9.1 R5.1 | length 123.5
  Top Layer w10: R5.1@4528,3161.63 4548.3,3182.03 J9.1@4643,3182
LASER: LASER1.3 RN5.7 RN5.8 U3.24 | length 5756.5
  Top Layer w10: RN5.7@4958.7,2951.53 4990.2,2951.53 4958,2951.53 v1(4957.96,2907) 4958,2822.03 4938,2802.03 4857.9,2802.03 4833,2826.93 4833,3556.93 4773,3616.93 4773,3702.03 4807.8,3736.83 5893.4,3736.83 5963,3806.43 5963,4102.03 5978,4117.03 LASER1.3@6123,4117.03
  Bottom Layer w10: U3.24@3141.7,2779.83 3141.7,2618.23 3178,2582.03 5188,2582.03 5248,2642.03 5248,2842.03 5183,2907.03 v1(4957.96,2907)
LED1_1: LED1.1 R1.1 | length 111.8
  Top Layer w10: LED1.1@5691.5,3665.73 LED1.1@5691.46,3670.74
  Top Layer w30: LED1.1@5691.46,3670.74 R1.1@5798.3,3670.73
LED2_1: LED2.1 R2.1 | length 106.8
  Top Layer w30: LED2.1@5691.46,3270.74 R2.1@5798.3,3270.73
MISO: RN4.4 SD1.7 U3.31 | length 1530.8
  Top Layer w10: SD1.7@3291.7,3399.83 v1(3456.7,3399.83) 3678.9,3399.83 3703,3375.73 3703,3289.73 3681.9,3268.63 RN4.4@3650.24,3268.6
  Bottom Layer w10: v1(3456.7,3399.83) 3768.2,3399.83 3841.7,3326.33 U3.31@3841.7,2779.83
MOSI: RN4.1 SD1.3 U3.37 | length 1652.8
  Top Layer w10: SD1.3@3291.7,3226.83 3456.9,3226.83 v1(3457.96,3225.74) 3543,3225.83 3555.8,3238.63 RN4.1@3555.76,3268.61 ; v1(3692.96,2970.74) 3692.96,2880.74 3722.96,2850.74 4370.79,2850.74 U3.37@4441.7,2779.83
  Bottom Layer w10: v1(3457.96,3225.74) 3663,3225.74 3692.96,3195.77 v1(3692.96,2970.74)
P5V: D1.2 U6.4 | length 168.4
  Top Layer w20: U6.4@4841.7,3679.83 4841.7,3598.73 D1.2@4903.4,3537
PDN_UART: J5.2 J6.2 J7.2 J8.2 J9.2 R5.2 | length 7529.3
  Top Layer w10: v1(4442.96,3547) 4443,3107.03 4468,3082.03 J9.2@4643,3082 4528,3082.03 R5.2@4527.96,3102.35
  Bottom Layer w10: J5.2@3441.7,4175.74 3594.3,4175.73 3628,4142.03 3628,3986.83 5886.8,3986.83 5913,4012.83 5913,4159.83 5898,4174.83 J8.2@5841.7,4174.83 ; 3628,3987.03 2688,3987.03 2663,3962.03 2663,3585.74 2701.73,3547 v1(4442.96,3547) ; J6.2@4241.7,4174.83 4395.1,4174.83 4431.1,4138.83 4431.1,3987.03 ; J7.2@5041.7,4174.83 5205.1,4174.83 5236.5,4143.53 5236.5,3987.03
PROBE: C5.2 RN1.1 U3.15 | length 412.8
  Top Layer w10: RN1.1@4138.9,3339.83 4176.7,3339.83 4176.7,3484.83 4141.7,3484.83 U3.15@4141.7,3679.83
Q4_1: Q4.1 RN5.1 | length 91.3
  Top Layer w10: RN5.1@4990.2,3022.43 4997.2,3029.43 Q4.1@5078.59,3029.4
Q4_3: CN5.1 D3.2 Q4.3 | length 552.4
  Top Layer w20: Q4.3@5157.33,2992 5157.3,2907.63 5253,2812.03 5253,2672.03 5334.2,2590.73 CN5.1@5334.2,2512.93
R3_1: Q1.1 R3.1 | length 117.9
  Top Layer w10: R3.1@5343.9,3566.63 Q1.1@5461.81,3566.91
R3_2: R3.2 R6.2 U13.3 | length 327.9
  Top Layer w10: U13.3@5143,3400.13 5276.2,3400.13 R6.2@5276.16,3386.03 R3.2@5276.26,3566.63
R4_1: Q2.1 R4.1 | length 117.9
  Top Layer w10: R4.1@5343.9,3161.63 Q2.1@5461.81,3161.01
R4_2: R4.2 R7.2 U2.3 | length 711.9
  Top Layer w10: U2.3@4943,3400.13 4943,3311.93 4977.9,3277.03 5242,3277.03 5276.3,3242.73 R4.2@5276.26,3161.63 R7.2@5276.16,2981.03
RN3_5: CN1.2 RN3.5 RN3.6 | length 2987.5
  Top Layer w10: CN1.2@3042.21,2512 3042.2,2664.93 3083,2705.73 4567.6,2705.73 4596.7,2734.83 4596.7,2847.03 4568,2875.73 3908,2875.73 3875.9,2907.83 RN3.6@3875.95,3269.41 RN3.5@3844.46,3269.41
RN3_7: CN2.2 RN3.7 RN3.8 | length 2588.5
  Top Layer w10: CN2.2@3442.21,2512 3442.2,2644.93 3483,2685.73 4578,2685.73 4616.7,2724.43 4616.7,2862.03 4583,2895.73 3938,2895.73 3907.4,2926.33 RN3.7@3907.45,3269.41 RN3.8@3938.94,3269.4
RN5_3: RN5.3 U13.1 | length 269.2
  Top Layer w10: RN5.3@4927.2,3022.43 4927.2,3066.23 4943,3082.03 5078,3082.03 5093,3097.03 U13.1@5093,3143.83
RN5_4: RN5.4 U2.1 | length 122.5
  Top Layer w10: U2.1@4893,3143.83 4893,3025.23 RN5.4@4895.7,3022.43
RX: P2.4 U3.34 | length 814.4
  Bottom Layer w10: U3.34@4141.7,2779.83 4141.7,2698.23 4168,2672.03 4793,2672.03 P2.4@4843.03,2722.02
S$63209: 
S$63211: 
S$63213: 
S$63215: 
S$63217: 
S$63219: 
S$63221: 
S$63238: 
S$63247: 
S$63249: 
S$63285: 
S$63287: 
S$63289: 
S$63291: 
S$123249: 
S$123251: 
S$123272: 
S$127871: 
S$378198: 
S$378202: 
S$378206: 
S$378210: 
S$378214: 
SCK: SD1.5 U3.30 | length 978.7
  Top Layer w10: SD1.5@3291.7,3313.83 3455.7,3313.83 v1(3456.7,3314.83)
  Bottom Layer w10: v1(3456.7,3314.83) 3718.2,3314.83 3746.7,3286.33 3746.7,2779.83 U3.30@3741.7,2779.83
SCL: P1.3 U3.36 | length 898.4
  Bottom Layer w10: U3.36@4341.7,2779.83 4341.7,2924.43 4383,2965.73 4791.7,2965.73 4823,2997.03 4823,3152.03 4793,3182.03 P1.3@4748,3182.03
SD_CS: RN4.2 SD1.2 U3.29 | length 1124
  Top Layer w10: SD1.2@3291.7,3183.83 3380.7,3183.83 v1(3381.7,3184.83) 3562.1,3184.83 3587.3,3210.03 RN4.2@3587.3,3268.63
  Bottom Layer w10: v1(3381.7,3184.83) 3337.7,3184.83 3303,3150.13 3303,3000.73 3338,2965.73 3603,2965.73 3641.7,2927.03 U3.29@3641.7,2779.83
SDA: P1.4 U3.33 | length 968.8
  Bottom Layer w10: U3.33@4041.7,2779.83 4041.7,2972.83 4085.9,3017.03 4728,3017.03 4743,3032.03 P1.4@4742.96,3082
ST_EN: RN4.3 U3.23 U7.1 U8.1 U9.1 U10.1 | length 5662.9
  Top Layer w10: U8.1@3541.7,3874.83 3443.9,3777.03 2741.7,3777.03 U7.1@2741.7,3874.83 2741.7,3775.73 2663,3697.03 v1(2663,3482.53) 2663,3211.93 2698,3177.03 3068.8,3177.03 3155.1,3090.73 3588,3090.73 3618.8,3121.53 RN4.3@3618.8,3268.63
  Bottom Layer w10: 2663,3213.41 v1(2663,3482.53) ; 2663,3213.43 2663,2905.73 2708,2860.73 3014.2,2860.73 3041.7,2833.23 U3.23@3041.7,2779.83
  Bottom Layer w10.24: U8.1@3525.4,3858.53 U8.1@3541.7,3874.83 3608.9,3942.03 4341.7,3942.03 ; U10.1@5153,3875.13 5086.1,3942.03 4341.7,3942.03 ; 4341.7,3942.03 U9.1@4341.7,3874.83 4341.7,3942.03
T0_2: RN2.7 RN2.8 T0.2 | length 1458.6
  Top Layer w10: RN2.7@4307.5,3269.43 RN2.8@4338.94,3269.4 4308,3269.43 4308,3015.73 4351.7,2972.03 4632.9,2972.03 4698,2907.03 4698,2612.03 4722.9,2587.03 5018,2587.03 5037.7,2567.23 T0.2@5037.71,2512.9
T1_2: RN2.5 RN2.6 T1.2 | length 1142.4
  Top Layer w10: RN2.5@4244.46,3269.41 RN2.6@4275.95,3269.41 4275.9,3004.03 4327.9,2952.03 4622.9,2952.03 4678,2897.03 4678,2611.13 4641.5,2574.73 T1.2@4641.51,2512.9
TX: P2.3 U3.35 | length 868.5
  Bottom Layer w10: U3.35@4241.7,2779.83 4241.7,2713.23 4263,2692.03 4773,2692.03 4788,2707.03 4788,2742.03 4818,2772.03 4922.9,2772.03 4943,2751.93 P2.3@4943.03,2722.02
U4_1: LED1.2 pad.2@5747.96,3475.74 pad.2@5752.96,3475.74 Q1.2 U4.1 | length 243.6
  Top Layer w30: LED1.2@5624.46,3670.74 5624.5,3607.33 pad.2@5751.9,3479.93
  other v1: 5894.22,3411.02 5929.22,3411.02 5964.22,3411.02 5673.82,3413.17 5717.13,3413.17 5760.43,3413.17 5803.74,3413.17 5894.22,3451.02 5929.22,3451.02 5964.22,3451.02 5673.82,3456.48 5717.13,3456.48 5760.43,3456.48 5803.74,3456.48 5673.82,3499.79 5717.13,3499.79 5760.43,3499.79 5803.74,3499.79 5673.82,3543.1 5717.13,3543.1 5760.43,3543.1 5803.74,3543.1
U5_1: LED2.2 pad.2@5747.96,3070.74 pad.2@5752.96,3070.74 Q2.2 U5.1 | length 250.2
  Top Layer w30: LED2.2@5624.46,3270.74 5624.5,3193.23 Q2.2@5746.61,3071.04
  other v1: 5893.62,3006.62 5928.62,3006.62 5963.62,3006.62 5673.82,3007.66 5717.13,3007.66 5760.43,3007.66 5803.74,3007.66 5893.62,3046.62 5928.62,3046.62 5963.62,3046.62 5673.82,3050.97 5717.13,3050.97 5760.43,3050.97 5803.74,3050.97 5673.82,3094.28 5717.13,3094.28 5760.43,3094.28 5803.74,3094.28 5673.82,3137.58 5717.13,3137.58 5760.43,3137.58 5803.74,3137.58
U8_2: J2.6 U8.2 | length 382.8
  Top Layer w10: U8.2@3641.7,3874.83 3841.7,4074.83 J2.6@3941.7,4074.83
U8_3: J2.4 U8.3 | length 382.8
  Top Layer w10: U8.3@3741.7,3874.83 3853.9,3987.03 3953.9,3987.03 J2.4@4041.7,4074.83
U8_4: J2.2 U8.4 | length 382.8
  Top Layer w10: U8.4@3841.7,3874.83 3908.9,3942.03 4008.9,3942.03 J2.2@4141.7,4074.83
U8_11: U8.11 Y.4 | length 176.9
  Bottom Layer w60: Y.4@4037,4549.83 4037,4379.53 U8.11@4041.7,4374.83
U8_12: U8.12 Y.3 | length 176.3
  Bottom Layer w60: Y.3@3938.56,4549.83 3938.6,4377.93 U8.12@3941.7,4374.83
U8_13: U8.13 Y.2 | length 175.6
  Bottom Layer w60: Y.2@3840.2,4549.83 3840.2,4376.33 U8.13@3841.7,4374.83
U8_14: U8.14 Y.1 | length 175
  Bottom Layer w60: U8.14@3741.7,4374.83 Y.1@3741.7,4549.83
U9_2: J3.6 U9.2 | length 382.8
  Top Layer w10: U9.2@4441.7,3874.83 4641.7,4074.83 J3.6@4741.7,4074.83
U9_3: J3.4 U9.3 | length 382.8
  Top Layer w10: U9.3@4541.7,3874.83 4653.9,3987.03 4753.9,3987.03 J3.4@4841.7,4074.83
U9_4: J3.2 U9.4 | length 382.8
  Top Layer w10: U9.4@4641.7,3874.83 4708.9,3942.03 4808.9,3942.03 J3.2@4941.7,4074.83
U9_11: U9.11 Z.4 | length 176.9
  Bottom Layer w60: Z.4@4837,4549.83 4837,4379.53 U9.11@4841.7,4374.83
U9_12: U9.12 Z.3 | length 176.3
  Bottom Layer w60: Z.3@4738.56,4549.83 4738.6,4377.93 U9.12@4741.7,4374.83
U9_13: U9.13 Z.2 | length 175.6
  Bottom Layer w60: Z.2@4640.2,4549.83 4640.2,4376.33 U9.13@4641.7,4374.83
U9_14: U9.14 Z.1 | length 175
  Bottom Layer w60: U9.14@4541.7,4374.83 Z.1@4541.7,4549.83
U10_2: J4.6 U10.2 | length 382.8
  Top Layer w10: U10.2@5241.7,3874.83 5441.7,4074.83 J4.6@5541.7,4074.83
U10_3: J4.4 U10.3 | length 382.8
  Top Layer w10: U10.3@5341.7,3874.83 5453.9,3987.03 5553.9,3987.03 J4.4@5641.7,4074.83
U10_4: J4.2 U10.4 | length 382.8
  Top Layer w10: U10.4@5441.7,3874.83 5447.1,3874.83 5514.3,3942.03 5608.9,3942.03 J4.2@5741.7,4074.83
U10_11: E.4 U10.11 | length 179.4
  Bottom Layer w60: E.4@5637,4549.83 5641.7,4549.83 U10.11@5641.7,4375.13
U10_12: E.3 U10.12 | length 176
  Bottom Layer w60: E.3@5538.56,4549.83 5538.6,4378.21 U10.12@5541.7,4375.11
U10_13: E.2 U10.13 | length 175.3
  Bottom Layer w60: E.2@5440.2,4549.83 5441.7,4548.33 U10.13@5441.7,4375.11
U10_14: E.1 U10.14 | length 174.7
  Bottom Layer w60: U10.14@5341.7,4375.13 E.1@5341.7,4549.83
X_1: U7.14 X.1 | length 175
  Bottom Layer w60: U7.14@2941.7,4374.83 X.1@2941.7,4549.83
X_2: U7.13 X.2 | length 175.6
  Bottom Layer w60: X.2@3040.2,4549.83 3040.2,4376.33 U7.13@3041.7,4374.83
X_3: U7.12 X.3 | length 176.3
  Bottom Layer w60: X.3@3138.56,4549.83 3138.6,4377.93 U7.12@3141.7,4374.83
X_4: U7.11 X.4 | length 176.9
  Bottom Layer w60: X.4@3237,4549.83 3237,4379.53 U7.11@3241.7,4374.83
X_DIR: U3.7 U7.8 | length 236.4
  Bottom Layer w10: U3.7@3341.7,3679.83 3341.7,3724.83 3441.7,3824.83 U7.8@3441.7,3874.83
X_LIMIT: C11.2 RN3.4 U3.28 | length 1189.8
  Top Layer w10: U3.28@3541.7,2779.83 3541.7,2989.43 3573,3020.73 3746.7,3020.73 3773,3047.03 3773,3470.83 3787.9,3485.73 C11.2@3846.2,3485.73 ; RN3.4@3844.5,3340.23 3808,3340.33 3808,3487.43 C11.2@3846.3,3487.39
X_STEP: U3.5 U7.7 | length 342.3
  Bottom Layer w10: U3.5@3141.7,3679.83 3141.7,3744.43 3188,3790.73 3298,3790.73 3341.7,3834.43 U7.7@3341.7,3874.83
X_UART: J5.1 U7.5 U7.6 | length 383.5
  Top Layer w10: U7.6@3241.7,3874.83 J5.1@3441.7,4075.74
  Bottom Layer w10: U7.5@3141.7,3874.83 U7.6@3241.7,3874.83
Y_DIR: U3.9 U8.8 | length 780.8
  Bottom Layer w10: U3.9@3541.7,3679.83 3651.7,3789.83 4156.7,3789.83 U8.8@4241.7,3874.83
Y_LIMIT: C4.2 RN3.1 U3.27 | length 1456.7
  Top Layer w10: U3.27@3441.7,2779.83 3441.7,3003.73 3478.8,3040.73 3736.7,3040.73 3753,3057.03 3753,3507.03 3775.8,3529.83 3921.7,3529.83 3937.4,3514.13 C4.2@3937.4,3487.39 3939.9,3484.83 3976.7,3484.83 3976.3,3340.23 RN3.1@3938.9,3340.23
Y_STEP: U3.8 U8.7 | length 780.8
  Bottom Layer w10: U3.8@3441.7,3679.83 3572.6,3810.73 4077.6,3810.73 U8.7@4141.7,3874.83
Y_UART: J6.1 U8.5 U8.6 | length 382.8
  Top Layer w10: U8.6@4041.7,3874.83 J6.1@4241.7,4074.83
  Bottom Layer w10: U8.5@3941.7,3874.83 U8.6@4041.7,3874.83
Z_DIR: U3.11 U9.8 | length 1380.8
  Top Layer w10: U3.11@3741.7,3679.83 3858.9,3797.03 4963.9,3797.03 U9.8@5041.7,3874.83
Z_LIMIT: C6.2 RN1.4 U3.14 | length 412.8
  Top Layer w10: U3.14@4041.7,3679.83 4041.7,3484.83 4006.7,3484.83 4006.7,3339.83 RN1.4@4044.5,3339.83
Z_STEP: U3.10 U9.7 | length 1380.8
  Top Layer w10: U3.10@3641.7,3679.83 3778.9,3817.03 4883.9,3817.03 U9.7@4941.7,3874.83
Z_UART: J7.1 U9.5 U9.6 | length 382.8
  Top Layer w10: U9.6@4841.7,3874.83 J7.1@5041.7,4074.83
  Bottom Layer w10: U9.5@4741.7,3874.83 U9.6@4841.7,3874.83
pads on no net: SD1. SD1.1 SD1.8 SD1.9 U3.2 U3.3 U3.4 U3.20 U3.21 U3.22

## Polygon pours and split planes (outlines as drawn)
GND on Bottom Layer (solid): 2492.96,4840.11 6162.96,4840.11 6702.96,4800.74 6712.96,2300.74 6322.96,2295.11 5037.96,2300.11 2612.96,2300.11 2412.96,2500.11 2412.96,4740.11 2492.96,4820.11
GND on Top Layer (solid): 2522.96,4815.11 6192.96,4815.11 6737.96,4825.74 6707.96,2230.74 6352.96,2270.11 5067.96,2275.11 2642.96,2275.11 2442.96,2475.11 2442.96,4715.11 2522.96,4795.11

## Keep-outs
Keep-Out Layer:
  lines w10: 2602.96,2480.11 ccw(c2721.07,2480.11) 2721.07,2362 ; 2602.96,4606.09 cw(c2721.07,4606.09) 2721.07,4724.2 ; 6421.86,2362 ccw(c6421.86,2480.11) 6539.97,2480.11 ; 6421.86,4724.2 cw(c6421.86,4606.09) 6539.97,4606.09